# Altium PCB PCB1.PcbDoc
Units mm, origin at the board's own origin, x right, y up, seen from the top; angles counter-clockwise.
Board outline 58 x 55 mm, 2 copper layers (Top Layer, Bottom Layer); 46 components, 31 nets, 178 pads, 27 vias.
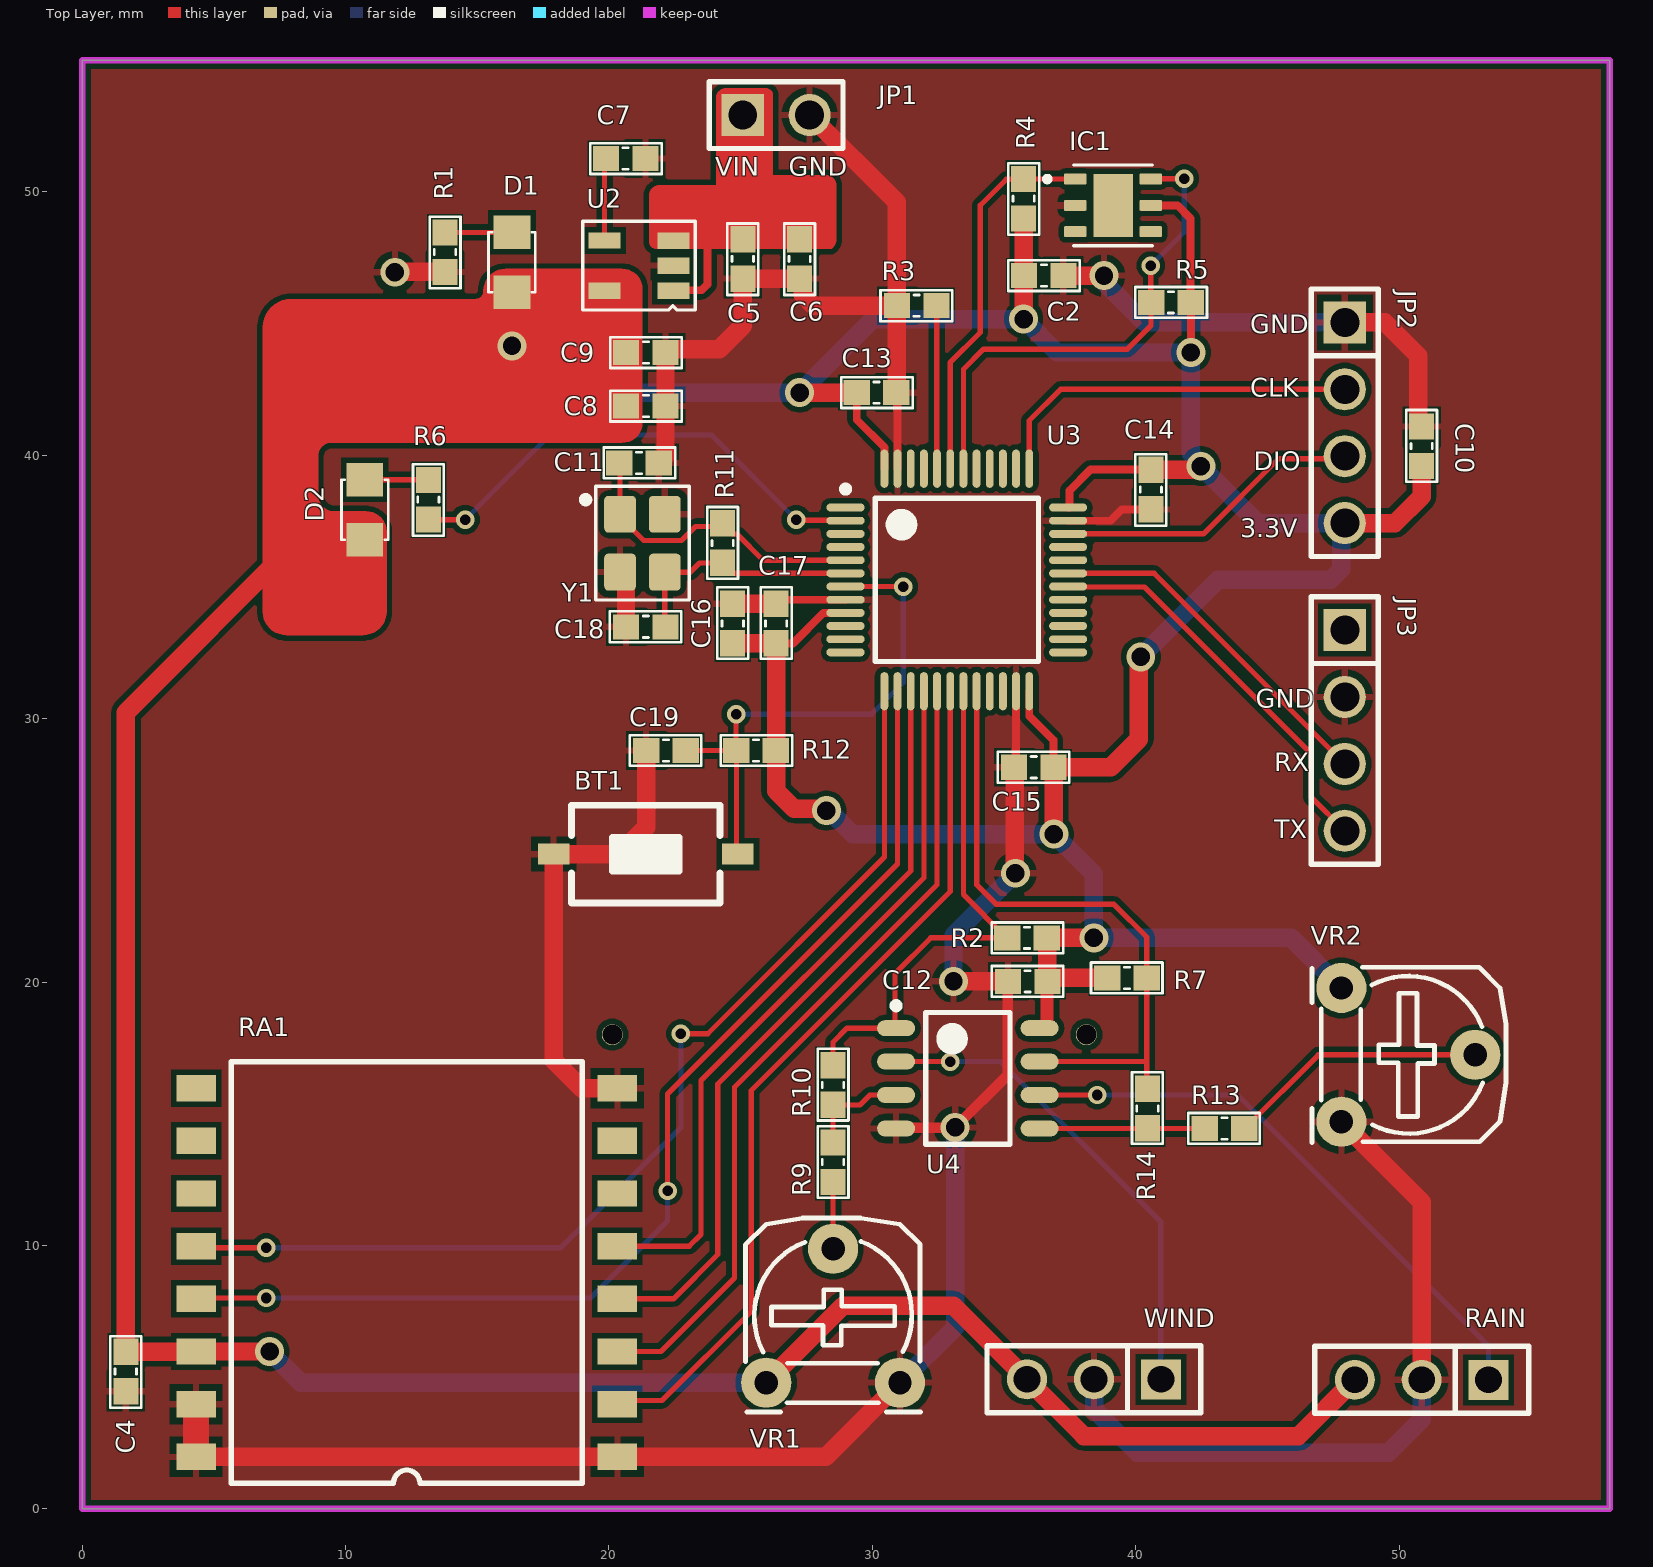
[diagram p0: Top Layer view]
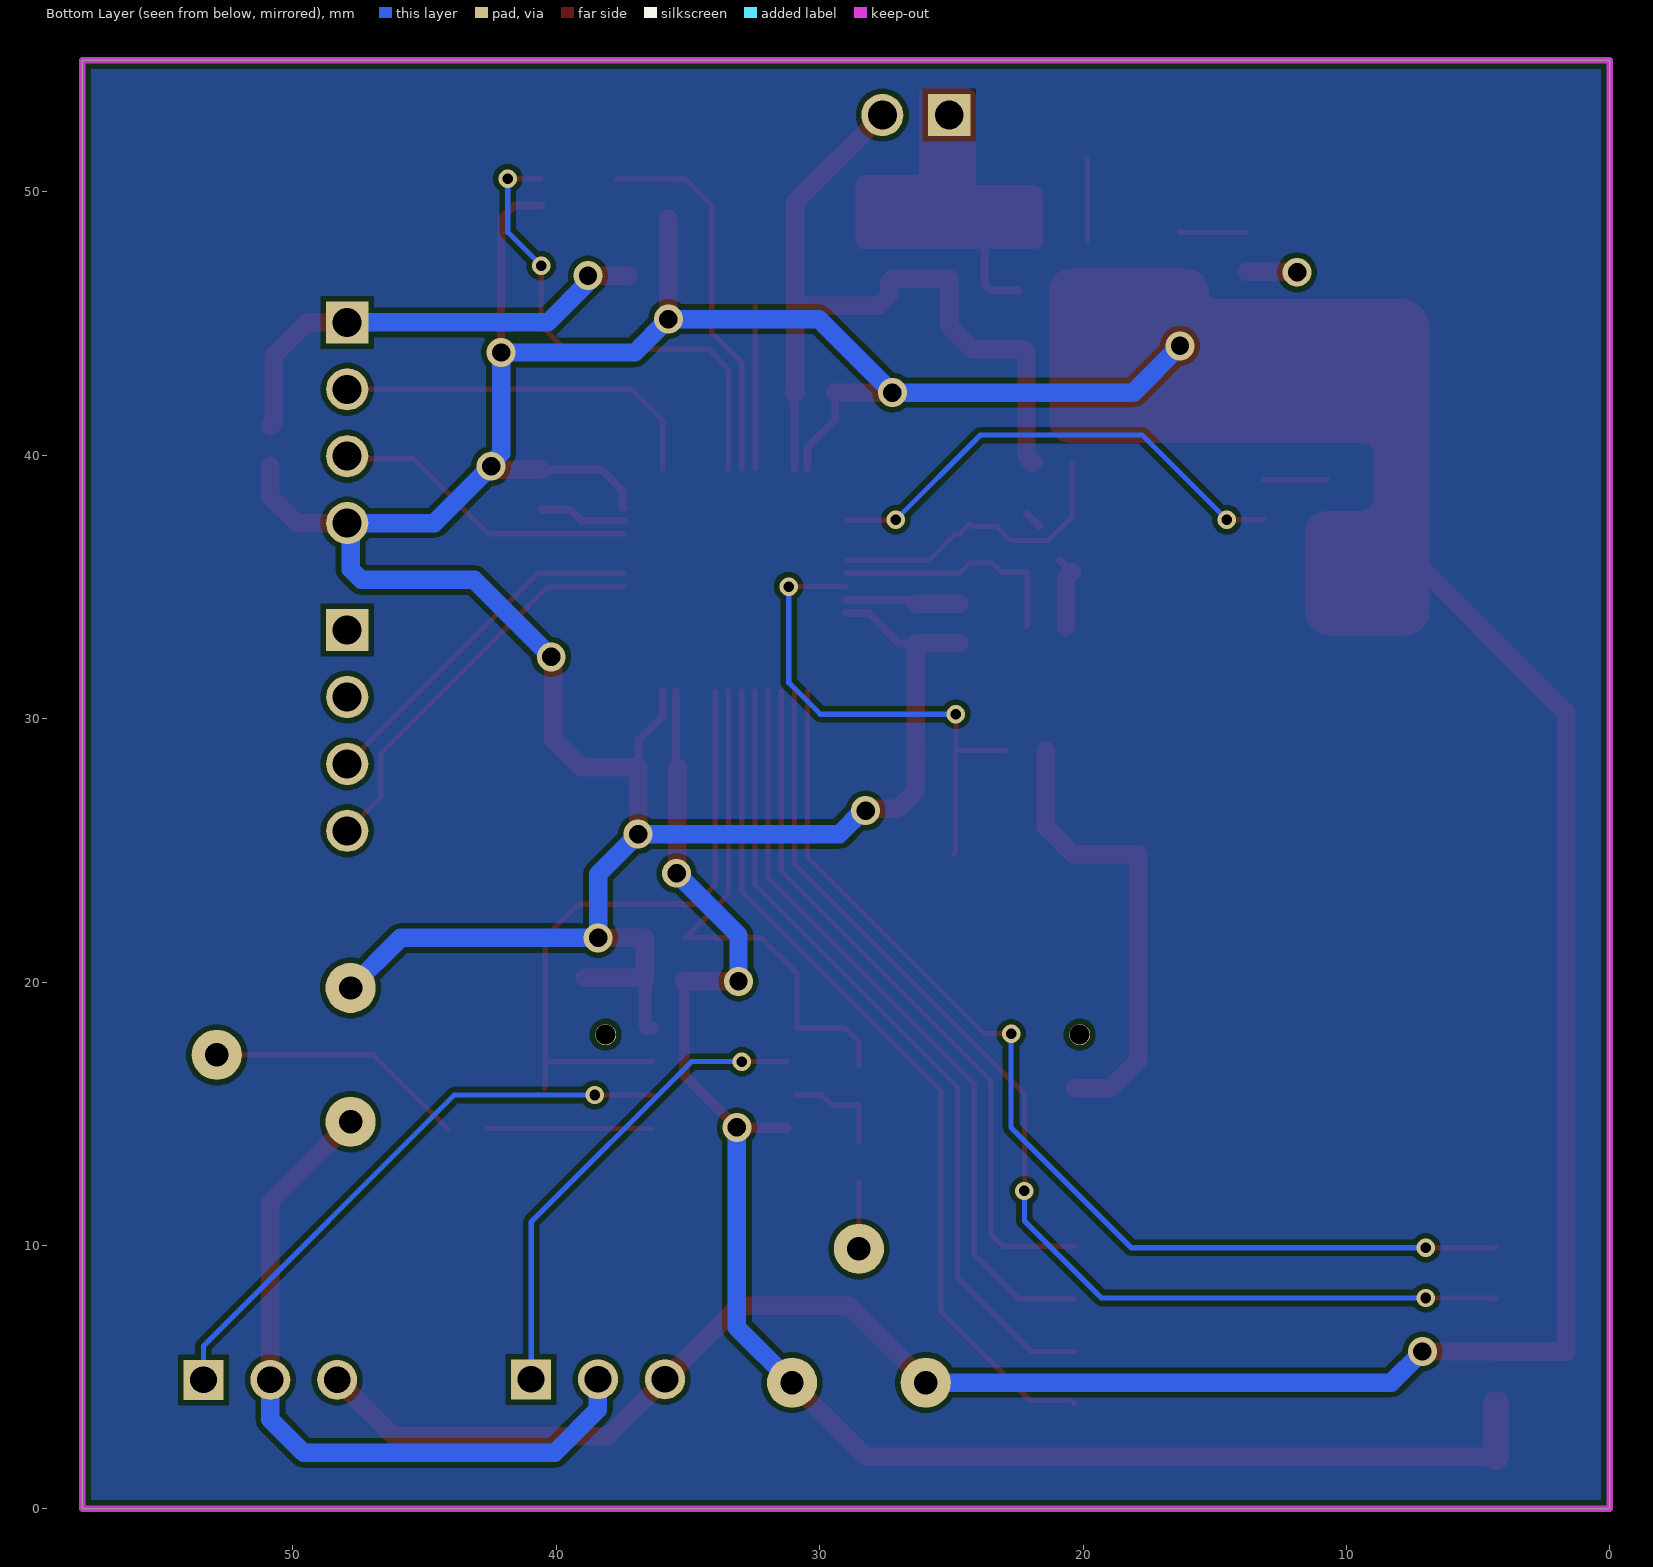
[diagram p1: Bottom Layer view, seen from below]
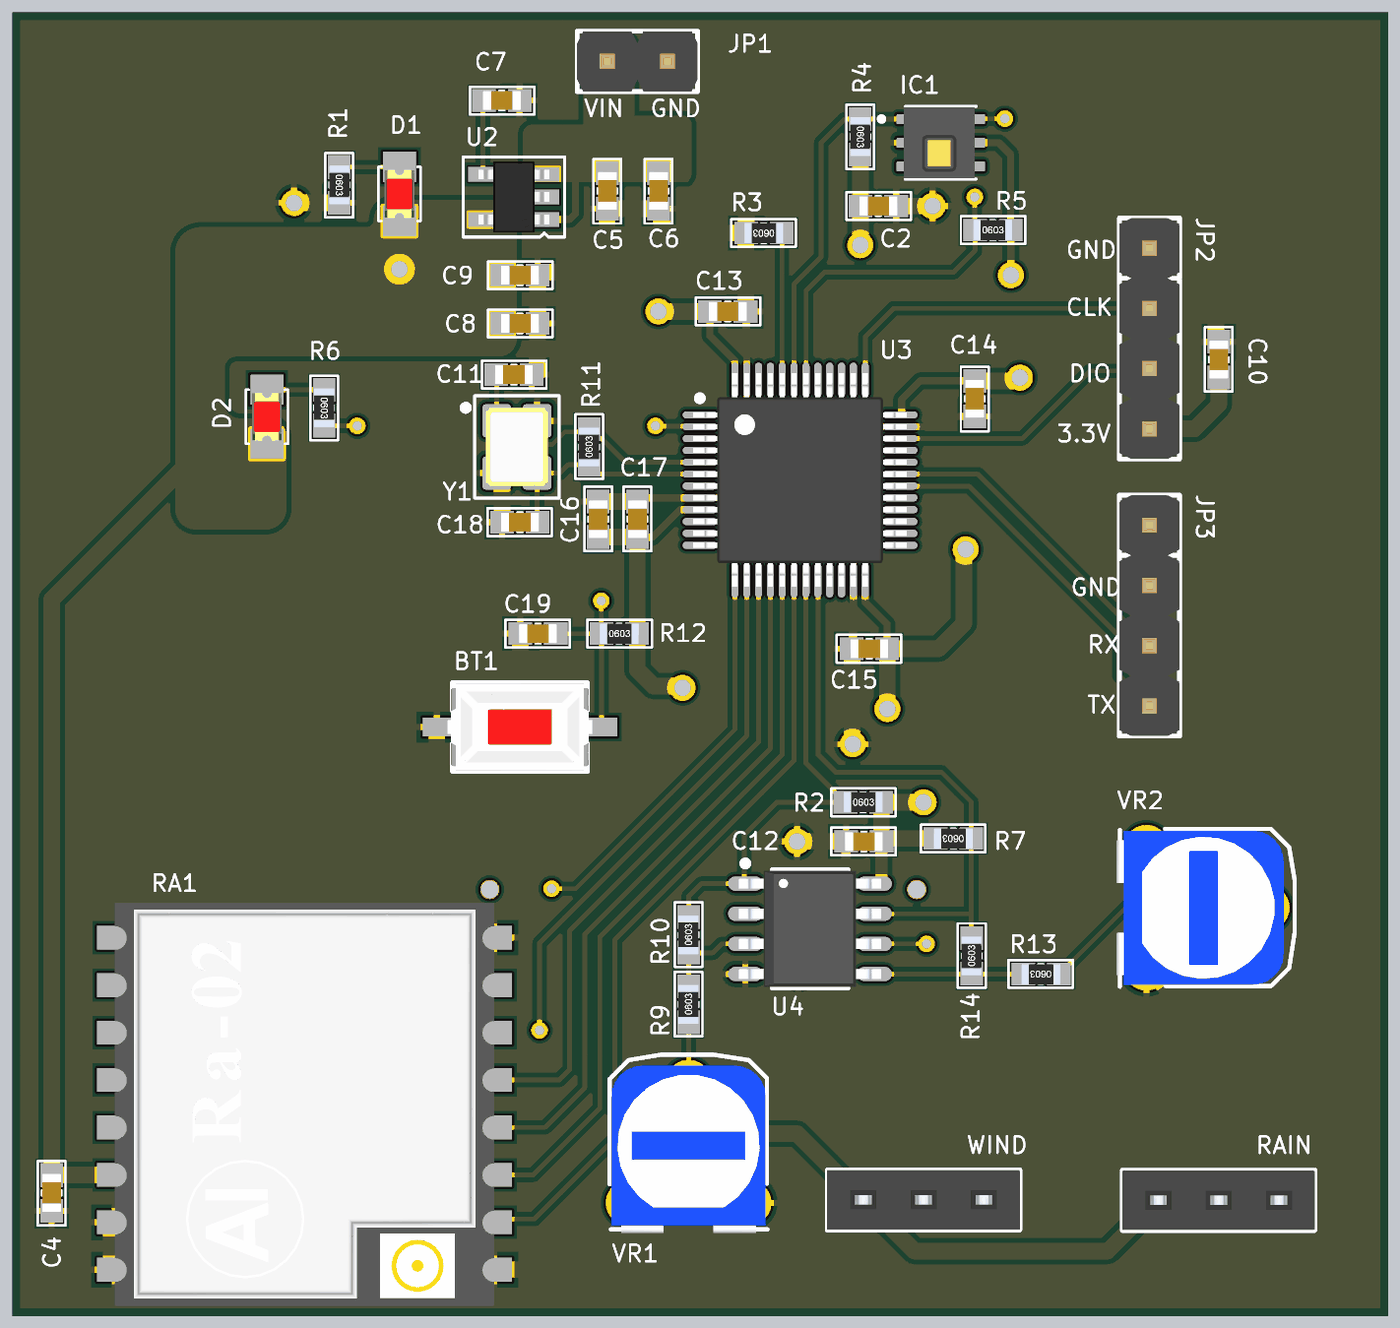
[diagram p2: 3D render of the assembled board from above, using the file's embedded part models]

## Layer stack, top to bottom
Top Solder: solder mask 0.0102, Solder Resist, Dk 3.5
Top Layer: signal copper 0.0356
Dielectric 1: dielectric 0.32, FR-4, Dk 4.8
Bottom Layer: signal copper 0.0356
Bottom Solder: solder mask 0.0102, Solder Resist, Dk 3.5

## Board outline
0,0 0,55 58,55 58,0

## Design rules (kind name [scope] priority, off if disabled: settings)
Clearance [All] p1: gap=0.2 ignorepadtopadclearanceinfootprint=FALSE
PolygonConnect [All] p1: connectstyle=Relief reliefconductorwidth=0.254 reliefentries=4 polygonreliefangle="90 Angle" airgapwidth=0.254
RoutingVias RoutingVias_POWER [InNetClass('POWER')] p1: holewidth=0.7 width=1.1 viastyle="Through Hole" minholewidth=0.4 minwidth=0.7 maxholewidth=0.7 maxwidth=1.1
RoutingVias RoutingVias_SIGNAL [All] p2: holewidth=0.4 width=0.7 viastyle="Through Hole" minholewidth=0.4 minwidth=0.7 maxholewidth=0.4 maxwidth=0.7
SolderMaskExpansion [All] p1: expansion=0.102 istentingtop=FALSE
Width width_POWER [InNetClass('POWER')] p1: maxlimit=1 minlimit=0.3 preferedwidth=0.7
Width width_SIGNAL [All] p2: maxlimit=0.2 minlimit=0.2 preferedwidth=0.2
30 further rules are at their usual default settings.

## Classes and differential pairs
net class POWER: GND VCC3V3 VIN
component class Sheet1: RA?

## Components (designator, comment, footprint, x,y, rotation, side; value= is the part's Value field where it differs from the comment)
BT1 "Nut Nhan 2 Chan SMD 3x6x2.5" "Nut Nhan 2 Chan SMD 3x6x2.5" 21.397,24.853 r0 top
C2 "104" "tu 0603" 36.51,46.824 r0 top
C4 "104" "tu 0603" 1.651,5.207 r270 top
C5 "105" "tu 0603" 25.08,47.459 r270 top
C6 "104" "tu 0603" 27.239,47.459 r270 top
C7 "22pF" "tu 0603" 20.635,51.269 r0 top
C8 "106" "tu 0603" 21.397,41.871 r0 top
C9 "104" "tu 0603" 21.397,43.903 r0 top
C10 "104" "tu 0603" 50.861,40.347 r90 top
C11 "20pF" "tu 0603" 21.143,39.712 r0 top
C12 "104" "tu 0603" 35.9,20.027 r180 top
C13 "104" "tu 0603" 30.16,42.379 r0 top
C14 "104" "tu 0603" 40.574,38.696 r270 top
C15 "104" "tu 0603" 36.129,28.155 r180 top
C16 "104" "tu 0603" 24.699,33.616 r90 top
C17 "103" "tu 0603" 26.35,33.616 r90 top
C18 "20pF" "tu 0603" 21.397,33.489 r180 top
C19 "105" "tu 0603" 22.159,28.79 r180 top
D1 "LED 0805" LED-0805-Red 16.317,46.189 r90 top (schematic designator L1)
D2 "LED 0805" LED-0805-Red 10.729,36.791 r90 top (schematic designator L2)
IC1 "HCD1080" HDC1080 36.87,47.904 r0 top
JP1 "VIN" "JP 1x2 DT" 25.08,52.92 r0 top
JP2 "SWD" "JP 1x4 DT" 47.94,45.046 r270 top
JP3 "UART" "JP 1x4 DT" 47.94,33.362 r270 top
R1 "510R" "tro smd 0603" 13.777,47.713 r270 top
R2 "3.3k" "tro smd 0603" 35.875,21.678 r0 top
R3 "100k" "tro smd 0603" 31.684,45.681 r180 top
R4 "4.7k" "tro smd 0603" 35.748,49.745 r270 top
R5 "4.7k" "tro smd 0603" 41.336,45.808 r0 top
R6 "510R" "tro smd 0603" 13.142,38.315 r270 top
R7 "3.3k" "tro smd 0603" 39.673,20.154 r180 top
R9 "1k" "tro smd 0603" 28.509,13.157 r90 top
R10 "15k" "tro smd 0603" 28.509,16.09 r90 top
R11 "1M" "tro smd 0603" 24.318,36.664 r90 top
R12 "10k" "tro smd 0603" 25.588,28.79 r0 top
R13 "1k" "tro smd 0603" 43.368,14.439 r180 top
R14 "15k" "tro smd 0603" 40.447,15.201 r90 top
RA1 "Lora RA_02" SOP16 20.32,1.969 r180 top
RAIN "RAIN" "JP 1x3 CT" 53.401,4.895 r180 top (schematic designator JP4)
U2 "RT9193-33GB" SOT23-5 21.143,47.205 r90 top
U3 "STM32F103xx_LQFP48" STM32_LQPF48 33.208,35.267 r0 top
U4 "LM393" LM393 33.627,16.344 r0 top
VR1 "100K" "Bien Tro Tam Giac Dung" 25.969,4.787 r0 top
VR2 "100K" "Bien Tro Tam Giac Dung" 47.813,19.773 r270 top
WIND "WIND" "JP 1x3 CT" 40.955,4.914 r180 top (schematic designator JP5)
Y1 "8M" "Thach Anh 4 chan 1" 21.27,36.664 r270 top value=4Mhz

## Footprints (in the part's own frame and the unit in brackets; to place one, negate y for a bottom-side part, rotate by r counter-clockwise, add the part's x,y. Pads: shape width x height; smd on the part's side, far side on the other; paste and mask are expansions set on the pad)
"Bien Tro Tam Giac Dung" [mil] "RM065"
  round 75 hole 35: 1(0,0) 2(100,200) 3(200,0)
  silkscreen extent -31,-44 231,246, body extent -28,-50 228,228, height 279
HDC1080 [mm]
  rrect25% 0.86x0.42 smd: 1(0.834,2.587) 2(0.834,1.587) 3(0.834,0.587) 4(3.704,0.587) 5(3.704,1.587) 6(3.704,2.587)
  rect 1.5x2.4 smd paste-2: 7(2.269,1.587)
  silkscreen extent -0.33,0.06 3.77,3.12, body extent 0.7,0.09 3.7,3.09, height 0.78
"JP 1x2 DT" [mm] "2 pins, 1 row, straight, gold plating"
  rect 1.6x1.6 hole 1.1: 1(0,0)
  round 1.6 hole 1.1: 2(2.54,0)
  silkscreen extent -1.27,-1.27 3.81,1.27, body extent -1.27,-1.27 3.81,1.27, height 8.54
"JP 1x3 CT" [mm]
  rect 1.52x1.52 hole 1.02: 1(0,0)
  round 1.52 hole 1.02: 2(2.54,0) 3(5.08,0)
  silkscreen extent -1.52,-1.27 6.6,1.27, body extent -1.52,-1.25 6.6,1.25, height 8.51
"JP 1x4 DT" [mm] "4 pins, 1 row, straight, gold plating"
  rect 1.6x1.6 hole 1.1: 1(0,0)
  round 1.6 hole 1.1: 2(2.54,0) 3(5.08,0) 4(7.62,0)
  silkscreen extent -1.27,-1.27 8.89,1.27, body extent -1.27,-1.27 8.89,1.27, height 8.54
LED-0805-Red [mil]
  rect 50x55 smd: 1(0,0) 2(90,0)
  silkscreen extent 0,-35 90,35, body extent 5,-25 85,25, height 43
LM393 [mm] "SOP, 8-Leads, Body 4,90x3,90mm, Pitch 1,27mm, IPC Medium Density"
  oval 1.45x0.6 smd: 1(-2.725,1.905) 2(-2.725,0.635) 3(-2.725,-0.635) 4(-2.725,-1.905) 5(2.725,-1.905) 6(2.725,-0.635) 7(2.725,0.635) 8(2.725,1.905)
  silkscreen extent -2.85,-2.5 1.6,2.88, body extent -3,-2.45 3,2.45, height 1.75
"Nut Nhan 2 Chan SMD 3x6x2.5" [mm] "Switch SMD type"
  rect 1.2x0.8 smd: 1(-3.5,0) 2(3.5,0)
  silkscreen extent -2.82,-1.85 2.82,1.85, body extent -3.05,-1.85 3.05,1.85, height 2.5
SOP16 [mm]
  rect 1.5x1 smd: 1(0,0) 2(0,-2) 3(0,-4) 4(0,-6) 5(0,-8) 6(0,-10) 7(0,-12) 8(0,-14) 9(16,-14) 10(16,-12) 11(16,-10) 12(16,-8) 13(16,-6) 14(16,-4) 15(16,-2) 16(16,0)
  silkscreen extent 1.33,-15 14.67,1, body extent 0,-15.48 16,1.52, height 3.2
SOT23-5 [mm] "CASE: SOT"
  rect 0.62x1.22 smd mask+0.076: 1(-0.953,-1.31) 2(-0.003,-1.31) 3(0.947,-1.31) 4(0.952,1.31) 5(-0.953,1.31)
  silkscreen extent -1.69,-2.14 1.69,2.14, body extent -1.5,-1.5 1.5,1.5, height 1.41
STM32_LQPF48 [mm]
  oval 1.45x0.3 smd: 1(-4.225,2.75) 2(-4.225,2.25) 3(-4.225,1.75) 4(-4.225,1.25) 5(-4.225,0.75) 6(-4.225,0.25) 7(-4.225,-0.25) 8(-4.225,-0.75) 9(-4.225,-1.25) 10(-4.225,-1.75) 11(-4.225,-2.25) 12(-4.225,-2.75) 25(4.225,-2.75) 26(4.225,-2.25) 27(4.225,-1.75) 28(4.225,-1.25) 29(4.225,-0.75) 30(4.225,-0.25) 31(4.225,0.25) 32(4.225,0.75) 33(4.225,1.25) 34(4.225,1.75) 35(4.225,2.25) 36(4.225,2.75)
  oval 0.3x1.45 smd: 13(-2.75,-4.225) 14(-2.25,-4.225) 15(-1.75,-4.225) 16(-1.25,-4.225) 17(-0.75,-4.225) 18(-0.25,-4.225) 19(0.25,-4.225) 20(0.75,-4.225) 21(1.25,-4.225) 22(1.75,-4.225) 23(2.25,-4.225) 24(2.75,-4.225) 37(2.75,4.225) 38(2.25,4.225) 39(1.75,4.225) 40(1.25,4.225) 41(0.75,4.225) 42(0.25,4.225) 43(-0.25,4.225) 44(-0.75,4.225) 45(-1.25,4.225) 46(-1.75,4.225) 47(-2.25,4.225) 48(-2.75,4.225)
  silkscreen extent -4.35,-3.1 3.1,3.57, body extent -4.5,-4.5 4.5,4.5, height 1.6
"Thach Anh 4 chan 1" [mm] "SMD Crystal 4-lead leadless package"
  rrect25% 1.4x1.2 smd: 1(-1.1,-0.85) 2(1.1,-0.85) 3(1.1,0.85) 4(-1.1,0.85)
  silkscreen extent -2.16,-2.29 2.16,1.78, body extent -1.65,-1.3 1.65,1.3, height 0.8
"tro smd 0603" [mm] "Chip Capacitor, 2-Leads, Body 1,60x0,80mm, IPC Medium Density"
  rect 1x0.95 smd mask+0.076: 1(-0.75,0) 2(0.75,0)
  silkscreen extent -1.35,-0.58 1.37,0.58, body extent -0.82,-0.42 0.82,0.43, height 0.44
"tu 0603" [mm] "Chip Capacitor, 2-Leads, Body 1,60x0,80mm, IPC Medium Density"
  rect 1x0.95 smd mask+0.076: 1(-0.75,0) 2(0.75,0)
  silkscreen extent -1.35,-0.58 1.37,0.58, body extent -0.8,-0.4 0.8,0.4, height 0.9

## Part data
C2 C4 C6 C9 C10 C13 C14 C15 C16: library part "Tu 0603 104 50V 10%", "Dán", Chung_Loai=Dán, Don_Vi=Con, Ma_Hang=MH004568, So_Chan=2, Ten_Linh_Kien="Tụ 0603 104-100nF 10% 50V"
C5: library part "Tu 0603 105 16V 20%", "Dán", Chung_Loai=Dán, Don_Vi=Con, Ma_Hang=MH004574, So_Chan=2, Ten_Linh_Kien="Tụ 0603 105-1uF 20% 16V"
C7: library part "Tu 0603 22pF 50V 10%", "Dán", Chung_Loai=Dán, Don_Vi=Con, Ma_Hang=MH004570, So_Chan=2, Ten_Linh_Kien="Tụ 0603 22pF 50V 10%"
C8: library part "Tu 0603 106 16V 20%", "Dán", Chung_Loai=Dán, Don_Vi=Con, Ma_Hang=MH004848, So_Chan=2, Ten_Linh_Kien="Tụ 0603-10uF 20% 16V"
C11 C18: library part "Tu 0805 20pF 50V 10%", "Dán", Chung_Loai=Dán, Don_Vi=Con, Ma_Hang=MH004558, So_Chan=2, Ten_Linh_Kien="Tụ 0805 20P 10% 50V"
C12: library part "Tu 0805 104 50V 10%", "Dán", Chung_Loai=Dán, Don_Vi=Con, Ma_Hang=MH004551, So_Chan=2, Ten_Linh_Kien="Tụ 0805 104-100nF 10% 50V"
C17: library part "Tu 0603 103 50V 10%", "Dán", Chung_Loai=Dán, Don_Vi=Con, Ma_Hang=MH004567, So_Chan=2, Ten_Linh_Kien="Tụ 0603 103-10nF 10% 50V"
C19: library part "Tu 0603 105 50V 10%", "Dán", Chung_Loai=Dán, Don_Vi=Con, Ma_Hang=MH004569, So_Chan=2, Ten_Linh_Kien="Tụ 0603 105-1uF 50V 10%"
D1 D2: library part "LED 0805 Do", "Dán", Chung_Loai=Dán, Don_Vi=Con, Ma_Hang=MH000897, Ten_Linh_Kien="LED 0805 Màu Đỏ (Red)"
JP1: library part "JP 1x2 2.54 Duc Thang", "Cắm", Chung_Loai=Cắm, Don_Vi=Con, Ma_Hang=MH000903, Ten_Linh_Kien="Jump Đơn Đực 2.54MM 1x40P Thẳng 11MM"
JP2 JP3: library part "JP 1x4 2.54 Duc Thang", "Cắm", Chung_Loai=Cắm, Don_Vi=Con, Ma_Hang=MH000903, Ten_Linh_Kien="Jump Đơn Đực 2.54MM 1x40P Thẳng 11MM"
R1 R6: library part "Tro 0603 5% 510R", "Dán", Chung_Loai=Dán, Don_Vi=Con, Ma_Hang=MH007667, So_Chan=2, Ten_Linh_Kien="Trở 0603 5% 510R"
R2 R7: library part "Tro 0603 5% 3.3k", "Dán", Chung_Loai=Dán, Don_Vi=Con, Ma_Hang=MH006332, So_Chan=2, Ten_Linh_Kien="Trở 0603 5% 3.3k"
R3: library part "Tro 0603 5% 100k", "Dán", Chung_Loai=Dán, Don_Vi=Con, Ma_Hang=MH006314, So_Chan=2, Ten_Linh_Kien="Trở 0603 5% 100k"
R4 R5: library part "Tro 0603 1% 1k", "Dán", Chung_Loai=Dán, Don_Vi=Con, Ma_Hang=MH006334, So_Chan=2, Ten_Linh_Kien="Trở 0603 1% 1k"
R9 R13: library part "Tro 0805 5% 2.2k", "Dán", Chung_Loai=Dán, Don_Vi=Con, Ma_Hang=MH005237, So_Chan=2, Ten_Linh_Kien="Trở 0805 5% 2.2k"
R10 R14: library part "Tro 0805 5% 6.8k", "Dán", Chung_Loai=Dán, Don_Vi=Con, Ma_Hang=MH005311, So_Chan=2, Ten_Linh_Kien="Trở 0805 5% 6.8k"
R11: library part "Tro 0603 5% 1M", "Dán", Chung_Loai=Dán, Don_Vi=Con, Ma_Hang=MH006909, So_Chan=2, Ten_Linh_Kien="Trở 0603 5% 1M"
R12: library part "Tro 0603 1% 10k", "Dán", Chung_Loai=Dán, Don_Vi=Con, Ma_Hang=MH006333, So_Chan=2, Ten_Linh_Kien="Trở 0603 1% 10k"
RAIN WIND: library part "JP 1x3 2.54 Cai Thang", "Cắm", Chung_Loai=Cắm, Don_Vi=Con, Ma_Hang=MH004006, Ten_Linh_Kien="Jump Đơn Cái 2.54MM 1x20P Thẳng"
U2: library part REG_5.5V-3.3V-0.3A-1W-SOT-23-5, "Linear Voltage Regulator IC 1 Output 300mA SOT-23-5", Alternate Part Number-1=NA, Case/Package=SOT-23-5, Manufacturer="Richtek USA Inc.", Supplier Part Number-1=C15651, Manufacturer Part Number=RT9193-33GB, Supplier-1=LCSC
VR1 VR2: library part "Bien tro tam giac 100K Dung", "Cắm", Chung_Loai=Cắm, Don_Vi=Con, Ma_Hang=MH003711, Ten_Linh_Kien="Biến Trở Tam Giác 104-100K RM065"
Y1: library part "Thach Anh 4 Chan SMD", "Crystal For all Crystal 2pin."
BT1: Ma_Hang=MH001036, Ten="Nút Nhấn 2 Chân 3x6x2.5MM SMD"
U3: ComponentLink1Description="Manufacturer Link", ComponentLink1URL=www.st.com/stm32, ComponentLink2Description=Datasheet, ComponentLink2URL=http://www.st.com/stonline/products/literature/ds/13587.pdf, DatasheetVersion="rev6, Mar-2008", PackageDescription="48-Pin Low-Profile Quad Flat Pack, 7 x 7 mm Body, 0.5 mm Pitch (LQFP48)", PackageReference=LQFP48, PackageVersion=Mar-2008, Published=30-May-2008, Publisher="Altium Limited"

## Free pads (board coordinates)
  round 0.8 hole 0.762: 9(20.127,18) 9(38.127,18)

## Via types
v1: diameter 1.1, hole 0.7, Top Layer to Bottom Layer, 15 vias
v2: diameter 0.7, hole 0.4, Top Layer to Bottom Layer, 12 vias

## Nets (pads, with @x,y where several pads share a name; then routed paths per layer and width w, separated by ;. In a path a pad name is that pad's centre, name@x,y a point inside that pad or via, vN(x,y) a via of type N, cw(c..) or ccw(c..) an arc to the next point about the centre after c; other vN are vias at no path point)
BOOT0: R3.1 U3.44 | length 6.2
  Top Layer w0.2: R3.1 32.446,45.669 32.446,39.504 U3.44
DIO0: RA1.12 U3.13 | length 40.7
  Top Layer w0.2: RA1.12 4.383,9.906 v2(6.985,9.906) ; v2(22.733,18.034) 23.749,18.034 30.458,24.743 U3.13
  Bottom Layer w0.2: v2(6.985,9.906) 18.161,9.906 22.733,14.478 v2(22.733,18.034)
GND: BT1.1 C2.2 C4.2 C5.2 C6.2 C7.2 C8.2 C9.2 C10.2 C11.2 C12.2 C13.2 C14.2 C15.2 C16.2 C17.2 C18.2 C19.2 IC1.2 JP1.2 JP2.1 JP3.2 R1.2 R3.2 RA1.1 RA1.8 RA1.15 RA1.16 RAIN.2 U2.2 U3.8 U3.23 U3.35 U3.47 U4.4 VR1.3 VR2.3 WIND.2 Y1.2 Y1.4 | length 169
  Top Layer w0.3: Y1.2 Y1.2@20.87,36.014 ; Y1.4@21.67,37.314 Y1.4 ; C17.2 26.501,34.517 U3.8 ; U3.47 C13.2@30.958,42.331 ; C15.2 35.458,28.234 U3.23 ; U3.35 39.041,37.517 39.47,37.946 C14.2
  Top Layer w0.4: U4.4@31.245,14.439 31.264,14.458 33.127,14.458 v1(33.147,14.478) 35.15,16.481 C12.2
  Top Layer w0.7: RA1.16 RA1.1 28.231,1.969 VR1.3 ; v1(11.872,46.951) 11.884,46.963 R1.2 ; RA1.8 18.956,15.969 17.897,17.028 BT1.1 20.381,24.853 21.409,25.881 C19.2 ; Y1.2 20.647,35.337 C18.2 ; C11.2 21.918,39.712 22.043,39.837 22.043,39.862 22.147,39.966 C8.2 C9.2 22.272,44.028 24.189,44.028 25.08,44.919 C5.2 C6.2 27.364,46.584 27.364,46.091 27.774,45.681 R3.2 ; C16.2 C17.2 ; JP1.2 30.934,49.606 R3.2 ; C13.2@30.958,42.331 30.922,42.367 30.922,45.669 R3.2 ; v1(33.081,20.027) C12.2 ; C15.2 35.406,28.128 35.406,24.157 v1(35.433,24.13) ; C2.2 v1(38.796,46.824) ; VR2.3 50.861,11.645 RAIN.2 ; JP2.1 49.464,45.046 50.736,43.774 50.736,41.222 C10.2
  Top Layer w1: RA1.16 RA1.15
  Bottom Layer w0.7: VR1.3 33.147,6.885 v1(33.147,14.478) ; v1(33.081,20.027) 33.081,21.778 v1(35.433,24.13) ; WIND.2 38.423,4.906 38.423,3.763 40.066,2.12 49.591,2.12 50.861,3.39 RAIN.2 ; v1@38.796,46.57 40.32,45.046 JP2.1
LORA_NSS: RA1.2 U3.18 | length 33.2
  Top Layer w0.2: RA1.2 20.459,4.108 22.015,4.108 25.4,7.493 25.4,15.875 32.958,23.433 U3.18
MISO: RA1.4 U3.16 | length 29.1
  Top Layer w0.2: RA1.4 22.447,7.969 24.13,9.652 24.13,16.129 31.958,23.957 U3.16
MOSI: RA1.3 U3.17 | length 31.1
  Top Layer w0.2: RA1.3 21.971,5.969 24.765,8.763 24.765,16.002 32.458,23.695 U3.17
NetC7_1: C7.1 U2.4 | length 3.1
  Top Layer w0.2: U2.4 19.833,51.217 C7.1
NetL1_2: D1.2 R1.1 | length 2.5
  Top Layer w0.2: R1.1 16.305,48.463 D1.2
NetL2_2: D2.2 R6.1 | length 2.4
  Top Layer w0.2: D2.2 13.13,39.077 R6.1
NetR9_1: R9.1 VR1.2 | length 2.5
  Top Layer w0.2: VR1.2 R9.1
NetR9_2: R9.2 R10.1 U4.3 | length 4
  Top Layer w0.2: R9.2 R10.1 28.521,15.328 29.525,15.328 29.906,15.709 U4.3
NetR13_1: R13.1 VR2.2 | length 9.9
  Top Layer w0.2: R13.1 44.143,14.439 46.937,17.233 VR2.2
NetR13_2: R13.2 R14.1 U4.5 | length 6.3
  Top Layer w0.2: U4.5 R13.2
OSC_IN: C11.1 R11.2 U3.5 Y1.1 | length 11.9
  Top Layer w0.2: C11.1 20.42,39.685 Y1.1 20.42,37.664 21.32,36.764 22.756,36.764 23.291,37.299 24.203,37.299 R11.2 24.318,37.389 24.693,37.014 24.857,37.014 25.854,36.017 U3.5
OSC_OUT: C18.1 R11.1 U3.6 Y1.3 | length 9.3
  Top Layer w0.2: C18.1 22.12,33.516 Y1.3 23.091,35.564 23.441,35.914 R11.1 24.318,35.896 24.693,35.521 28.979,35.521 U3.6
PC13: R6.2 U3.2 | length 18.5
  Top Layer w0.2: R6.2 13.154,37.553 v2(14.539,37.553) ; v2(27.112,37.553) 27.13,37.535 28.965,37.535 U3.2
  Bottom Layer w0.2: v2(14.539,37.553) 17.753,40.767 23.898,40.767 v2(27.112,37.553)
RAIN_HALL: RAIN.1 U4.6 | length 22.3
  Top Layer w0.2: U4.6 v2(38.542,15.709)
  Bottom Layer w0.2: v2(38.542,15.709) 43.876,15.709 53.401,6.184 RAIN.1
RAIN_OUT: R7.1 R14.2 U3.20 U4.7 | length 24.5
  Top Layer w0.2: U3.20 33.97,31.03 33.97,23.688 34.71,22.948 39.177,22.948 40.423,21.702 R7.1 40.423,17.016 ; U4.7 40.386,16.979 40.423,17.016 ; R14.2 40.423,15.975 40.423,17.016
RESET: BT1.2 C19.1 R12.1 U3.7 | length 20
  Top Layer w0.2: C19.1 R12.1 ; v2(24.826,30.172) 24.826,28.802 R12.1 ; BT1.2 24.838,24.912 R12.1 ; U3.7 28.985,35.015 31.174,35.015 v2(31.176,35.013)
  Bottom Layer w0.2: v2(24.826,30.172) 29.98,30.172 31.176,31.368 v2(31.176,35.013)
RESET_LORA: RA1.13 U3.14 | length 42.9
  Top Layer w0.2: RA1.13 4.352,8.001 v2(6.985,8.001) ; v2(22.225,12.065) 22.225,15.748 30.958,24.481 U3.14
  Bottom Layer w0.2: v2(6.985,8.001) 19.304,8.001 22.225,10.922 v2(22.225,12.065)
RX: JP3.3 U3.31 | length 13.5
  Top Layer w0.2: U3.31 40.705,35.517 JP3.3
SCK: RA1.5 U3.15 | length 27.3
  Top Layer w0.2: RA1.5 23.05,9.969 23.495,10.414 23.495,16.256 31.458,24.219 U3.15
SCL: IC1.6 R5.1 U3.42 | length 19
  Top Layer w0.2: U3.42 33.462,39.496 33.462,43.268 34.224,44.03 39.685,44.03 40.586,44.931 R5.1 40.574,45.82 v2(40.574,47.205) ; IC1.6 40.582,50.499 41.836,50.499 v2(41.844,50.507)
  Bottom Layer w0.2: v2(40.574,47.205) 41.844,48.475 v2(41.844,50.507)
SDA: IC1.1 R4.1 U3.43 | length 14.5
  Top Layer w0.2: U3.43 32.954,39.496 32.954,43.522 34.097,44.665 34.097,49.491 35.09,50.484 35.737,50.484 R4.1 35.752,50.491 IC1.1
SWDCLK: JP2.2 U3.37 | length 14.3
  Top Layer w0.2: U3.37 35.958,41.319 37.145,42.506 JP2.2
SWDIO: JP2.3 U3.34 | length 11.7
  Top Layer w0.2: U3.34 42.578,37.017 45.433,39.872 47.846,39.872 JP2.3
TX: JP3.4 U3.30 | length 15.3
  Top Layer w0.2: U3.30 37.452,34.998 40.335,34.998 46.67,28.663 46.67,27.012 JP3.4
VCC3V3: C2.1 C4.1 C8.1 C9.1 C10.1 C12.1 C13.1 C14.1 C15.1 C16.1 C17.1 D1.1 D2.1 IC1.5 JP2.4 R2.2 R4.2 R5.2 R7.2 R12.2 RA1.14 RAIN.3 U2.5 U3.9 U3.24 U3.36 U3.48 U4.8 VR1.1 VR2.1 WIND.3 | length 252.5
  Top Layer w0.3: D1.1 16.355,46.227 19.808,46.227 U2.5 ; U2.5@19.833,46.252 19.833,44.667 20.271,44.228 20.322,44.228 C9.1 ; C17.1 26.362,32.854 26.985,32.854 28.148,34.017 U3.9 ; C13.1 29.41,41.351 30.458,40.303 U3.48 ; U3.24 35.958,30.104 36.879,29.183 C15.1 ; C12.1@36.638,20.04 C12.1 C12.1@36.695,19.982 ; U3.36 37.488,38.017 37.488,38.658 38.288,39.458 40.562,39.458 C14.1 ; IC1.5 41.59,49.491 42.086,48.995 R5.2 42.098,45.796 v1(42.098,43.903)
  Top Layer w0.5: U4.8 36.591,18.249 36.638,18.295 C12.1@36.638,20.04
  Top Layer w0.7: v1(7.112,5.969) RA1.14 4.314,5.963 1.657,5.963 C4.1 1.651,30.226 8.216,36.791 D2.1 11.006,36.514 11.006,35.752 ; D2.1@10.64,36.766 8.697,36.766 7.427,38.036 7.427,40.83 8.443,41.846 20.622,41.846 C8.1 ; v1(16.317,44.157) D1.1 ; C8.1 C9.1 ; C16.1 C17.1 26.344,32.86 26.344,28.796 R12.2 26.338,28.671 26.344,28.665 26.344,27.265 27.028,26.581 28.178,26.581 v1(28.255,26.504) ; VR1.1 28.89,7.708 33.081,7.708 WIND.3 38.034,2.755 46.181,2.755 RAIN.3 ; v1(27.239,42.379) C13.1 ; v1(35.748,45.173) 35.754,45.179 C2.1@35.754,46.818 ; R4.2@35.754,48.989 C2.1@35.754,46.818 ; C2.1 C2.1@35.754,46.818 ; C12.1@36.638,20.04 36.638,21.665 36.65,21.678 v1(38.415,21.678) ; C12.1 36.675,20.027 36.802,20.154 R7.2 ; C15.1 39.05,28.155 40.116,29.221 40.116,32.269 v1(40.193,32.346) ; C15.1@36.885,28.149 36.885,25.621 v1(36.891,25.615) ; C14.1 42.232,39.446 42.371,39.585 v1(42.479,39.585) ; JP2.4 49.845,37.426 50.861,38.442 C10.1
  Bottom Layer w0.7: v1(7.112,5.969) 8.294,4.787 VR1.1 ; v1(16.317,44.157) 18.095,42.379 v1(27.239,42.379) 30.033,45.173 v1(35.748,45.173) 37.018,43.903 v1(42.098,43.903) 42.098,40.074 42.479,39.693 v1(42.479,39.585) 44.638,37.426 JP2.4 47.813,37.299 47.813,35.677 47.403,35.267 43.114,35.267 v1(40.193,32.346) ; v1(28.255,26.504) 28.363,26.504 29.252,25.615 v1(36.891,25.615) 38.415,24.091 v1(38.415,21.678) 45.908,21.678 VR2.1
VIN: C5.1 C6.1 JP1.1 U2.1 U2.3 | length 12.6
  Top Layer w0.3: U2.1 22.467,46.267 23.513,46.267 23.738,46.492 23.738,48.152 ; U2.3 23.738,48.152 ; C5.1 25.023,48.152 23.738,48.152
  Top Layer w0.7: JP1.1 C5.1 C6.1
WIND_HALL: U4.2 WIND.1 | length 18.2
  Top Layer w0.2: U4.2@31.245,16.979 v2(32.954,16.979)
  Bottom Layer w0.2: v2(32.954,16.979) 34.859,16.979 40.955,10.883 WIND.1
WIND_OUT: R2.1 R10.2 U3.19 U4.1 | length 20.4
  Top Layer w0.2: R10.2 28.509,17.714 29.044,18.249 U4.1 30.861,18.29 30.861,20.32 32.219,21.678 35.1,21.678 33.458,23.32 U3.19
pads on no net: IC1.3 IC1.4 IC1.7 JP3.1 RA1.6 RA1.7 RA1.9 RA1.10 RA1.11 U3.1 U3.3 U3.4 U3.10 U3.11 U3.12 U3.21 U3.22 U3.25 U3.26 U3.27 U3.28 U3.29 U3.32 U3.33 U3.38 U3.39 U3.40 U3.41 U3.45 U3.46

## Polygon pours and split planes (outlines as drawn)
GND on Top Layer "NONET_L-01_P-001" (solid, pour order 0): 0.127,0 58.127,0 58.127,55 0.127,55
no net on Bottom Layer "NONET_L-01_P-001" (solid, pour order 1): 0.127,0 58.127,0 58.127,55 0.127,55

## Keep-outs
Keep-Out Layer:
  lines w0.25: 0,0 58,0 58,55 0,55 0,0
  lines w0.254: 0.127,55 ccw(c0.127,55) 0.127,55

## Other copper
Top Layer:
  region net VIN: 24.064,53.555 24.064,50.253 21.905,50.253 ccw(c21.905,49.872) 21.524,49.872 21.524,49.491 21.524,48.094 ccw(c21.778,48.094) 21.778,47.84 28.464,47.84 ccw(c28.128,48.221) 28.636,48.221 28.636,50.253 ccw(c28.255,50.253) 28.255,50.634 26.223,50.634 26.223,53.682 ccw(c25.969,53.682) 25.969,53.936 24.445,53.936 ccw(c24.445,53.555)
  region net VCC3V3: 16.063,47.078 20.508,47.078 cw(c20.508,46.316) 21.27,46.316 21.27,41.236 cw(c20.512,41.236) 20.512,40.478 9.463,40.478 ccw(c9.463,39.966) 8.951,39.966 8.951,38.507 ccw(c9.586,38.507) 9.586,37.872 10.79,37.872 cw(c10.79,37.107) 11.556,37.107 11.556,35.902 11.556,34.062 cw(c10.665,34.062) 10.665,33.171 9.586,33.171 7.744,33.171 cw(c7.744,34.061) 6.855,34.061 6.855,44.855 cw(c7.935,44.855) 7.935,45.935 12.126,45.935 14.92,45.935 ccw(c14.92,46.248) 15.233,46.248 cw(c16.063,46.248)

## Silkscreen, mask and mechanical layers (free items; w line width, h text height)
Top Overlay:
  text "VIN" at 24.037,50.607 h0.7
  text "GND" at 26.831,50.607 h0.7
  text "GND" at 44.357,44.638 h0.7
  text "CLK" at 44.357,42.225 h0.7
  text "DIO" at 44.484,39.431 h0.7
  text "3.3V" at 43.976,36.891 h0.7
  text "GND" at 44.559,30.414 h0.7
  text "RX" at 45.259,28.001 h0.7
  text "TX" at 45.259,25.461 h0.7